# EAGLE board KW2CPU.PCB (EAGLE 6.5.0)
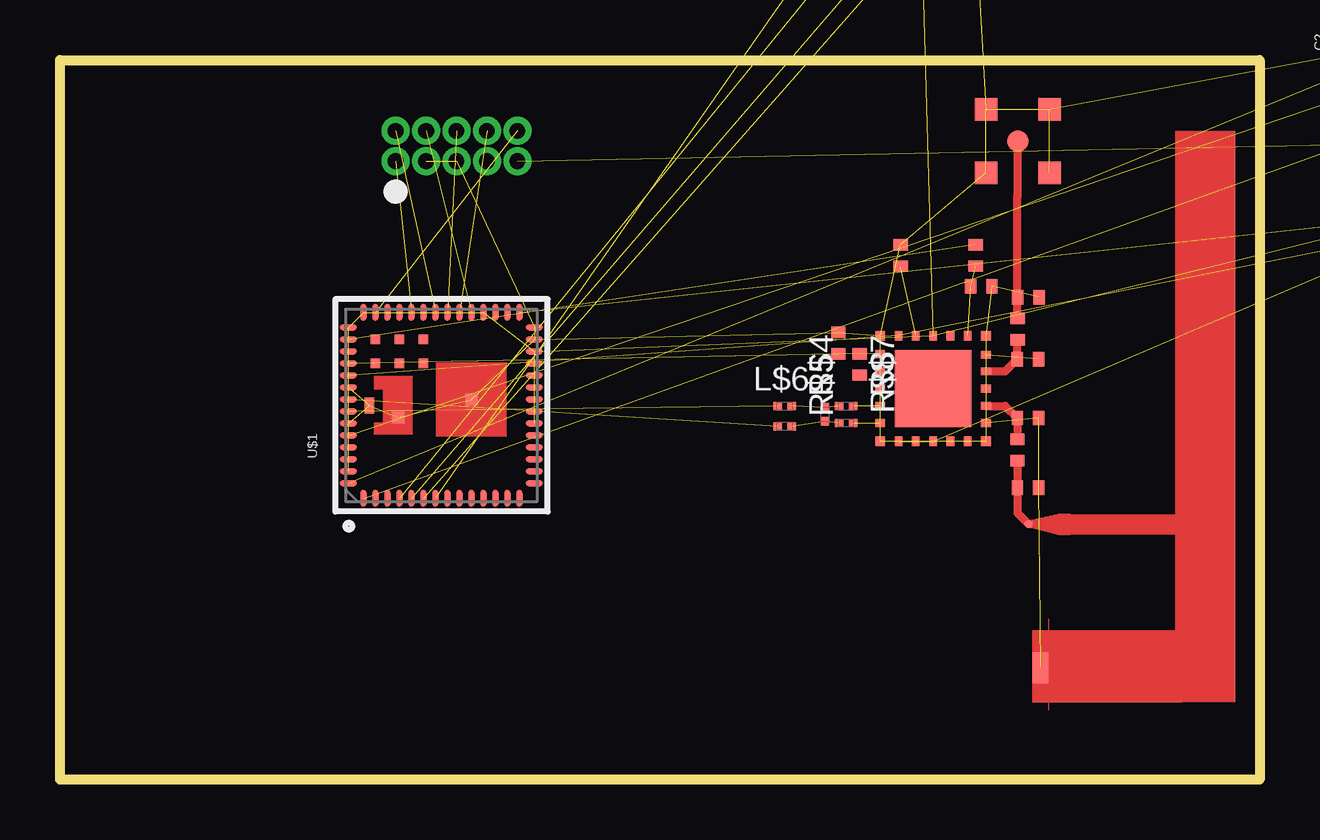
[diagram p0: board, top side]

Size 50 x 30 mm. Coordinates in mm from the lower left corner, seen from the top.
Outline: 0,30 50,30 50,0 0,0 0,30
Copper layers (1*2*3*16): Top 0.035559375mm / dielectric 10mil / Route2 0.035559375mm / dielectric 38mil / Route3 0.035559375mm / dielectric 10mil / Bottom 0.035559375mm
Design rules "SilverCircuits *": minimum track width 7mil, minimum drill 14mil, track to track 7mil, track to pad 7mil, pad to pad 7mil, via to via 7mil, smd to smd 0mil, copper to edge 20mil, drill to drill 8mil, minimum pad ring 10mil, minimum via ring 8mil, stop-mask expansion 4mil, vias tented up to drill 0mil, thermal gap 10mil

## Footprints (pad centres in the part's own frame; a part is rotated, then mirrored left to right if it is on the bottom)
C0402 = smd 0.5 x 0.6: 1 -0.5,0; 2 0.5,0
RF-L0201 = smd 0.33 x 0.356: P$1 0,-0.29; P$2 0,0.29
RFMD0402 = smd 0.475 x 0.6: P$1 -0.445,0; P$2 0.445,0
8S1 = smd 0.6 x 1.6: 1 -1.905,-2.654; 2 -0.645,-2.654; 3 0.625,-2.654; 4 1.895,-2.654; 5 1.905,2.654; 6 0.635,2.654; 7 -0.635,2.654; 8 -1.905,2.654
2X5HDR = drill 0.65: P$1 -2.54,-1.27; P$2 -2.54,0; P$3 -1.27,-1.27; P$4 -1.27,0; P$5 0,-1.27; P$6 0,0; P$7 1.27,-1.27; P$8 1.27,0; P$9 2.54,-1.27; P$10 2.54,0
RF-R0402 = smd 0.5 x 0.6: 1 -0.5,0; 2 0.5,0
LGA63 = smd 0.711 x 0.254: P$1 0.125,7.25; P$2 0.125,6.75; P$3 0.125,6.25; P$4 0.125,5.75; P$5 0.125,5.25; P$6 0.125,4.75; P$7 0.135,4.25; P$8 0.135,3.75; P$9 0.125,3.25; P$10 0.125,2.75; P$11 0.125,2.25; P$12 0.125,1.75; P$13 0.125,1.25; P$14 0.125,0.75; P$29 7.875,0.75; P$30 7.875,1.25; P$31 7.875,1.75; P$32 7.875,2.25; P$33 7.875,2.75; P$34 7.875,3.25; P$35 7.885,3.75; P$36 7.885,4.25; P$37 7.875,4.75; P$38 7.875,5.25; P$39 7.875,5.75; P$40 7.875,6.25; P$41 7.875,6.75; P$42 7.875,7.25 | smd 0.254 x 0.711: P$15 0.75,0.125; P$16 1.25,0.125; P$17 1.75,0.125; P$18 2.25,0.125; P$19 2.75,0.125; P$20 3.25,0.125; P$21 3.75,0.135; P$22 4.25,0.135; P$23 4.75,0.125; P$24 5.25,0.125; P$25 5.75,0.125; P$26 6.25,0.125; P$27 6.75,0.125; P$28 7.25,0.125; P$43 7.25,7.875; P$44 6.75,7.875; P$45 6.25,7.875; P$46 5.75,7.875; P$47 5.25,7.874; P$48 4.751,7.874; P$49 4.25,7.874; P$50 3.75,7.875; P$51 3.25,7.875; P$52 2.75,7.875; P$53 2.25,7.875; P$54 1.75,7.875; P$55 1.25,7.875; P$56 0.75,7.875 | smd 0.406 x 0.406: P$57 5.75,6.75; P$58 6.75,6.75; P$59 5.75,5.75; P$60 6.75,5.75; P$61 5.75,4.75; P$62 6.75,4.75 | smd 0.66 x 0.406: P$63 4,7 | smd 0.5 x 0.5: P$64 3.5,5.812; P$65 4.25,2.75
32MHZSMD = smd 1.4 x 1.2: P$1 -1.1,-0.8; P$2 1.1,-0.8; P$3 1.1,0.8; P$4 -1.1,0.8
RF6555 = smd 0.4 x 0.4: P$1 -2.2,2.2; P$7 -2.2,-2.2; P$13 2.2,-2.2; P$19 2.2,2.2 | smd 0.4 x 0.32: P$2 -2.2,1.44; P$3 -2.2,0.72; P$4 -2.2,0; P$5 -2.2,-0.72; P$6 -2.2,-1.44; P$14 2.2,-1.44; P$15 2.2,-0.72; P$16 2.2,0; P$17 2.2,0.72; P$18 2.2,1.4 | smd 0.32 x 0.4: P$8 -1.44,-2.2; P$9 -0.72,-2.2; P$10 0,-2.2; P$11 0.72,-2.2; P$12 1.44,-2.2; P$20 1.44,2.2; P$21 0.72,2.2; P$22 0,2.2; P$23 -0.72,2.2; P$24 -1.44,2.2 | smd 3.2 x 3.2: P$25 0,0
F_ANT_RFMD = smd 0.333 x 0.333: P$1 -3.912,2.68 | smd 0.635 x 1.27: P$2 -3.404,-3.302
MMCX_VERT = smd 0.89 x 0.89: P$1 0,0 | smd 0.94 x 0.94: P$2 -1.32,1.32; P$3 1.32,1.32; P$4 1.32,-1.32; P$5 -1.32,-1.32

## Placement (x,y rotation side)
C1  12pF  [C0402]  61.59,32.27 270 top  (outside the outline)
C2  12pF  [C0402]  76.46,37.03 90 top  (outside the outline)
C5  0.1uF  [C0402]  79.5,37.8 90 top  (outside the outline)
C6  1000pF  [C0402]  81.3,37.8 90 top  (outside the outline)
C7  5pF  [C0402]  80.4,37.8 90 top  (outside the outline)
C8  0.33uF  [C0402]  85.3,38 90 top  (outside the outline)
C9  33pF  [C0402]  84.4,38 90 top  (outside the outline)
C10  5pF  [C0402]  83.8,26.2 270 top  (outside the outline)
C11  1000pF  [C0402]  82.8,26.2 270 top  (outside the outline)
C12  0.33uF  [C0402]  81.8,26.2 270 top  (outside the outline)
C13  5pF  [C0402]  91,30.8 90 top  (outside the outline)
C14  1000pF  [C0402]  90,30.8 90 top  (outside the outline)
C15  0.1uF  [C0402]  89,30.8 90 top  (outside the outline)
C16  0.1uF  [C0402]  89.2,38.1 0 top  (outside the outline)
C17  1000pF  [C0402]  89.2,37.1 0 top  (outside the outline)
C18  5pF  [C0402]  89.2,36.1 0 top  (outside the outline)
C19  0.1uF  [C0402]  85.7,26.2 90 top  (outside the outline)
C$9  [RF-L0201]  60,40 0 top  (outside the outline)
C$10  [RF-L0201]  62,39 0 top  (outside the outline)
C$13  [RFMD0402]  40.35,15.07 0 top
C$15  [RFMD0402]  40.35,12.17 0 top
C$16  [RFMD0402]  40.37,20.11 0 top
C$18  [RFMD0402]  40.34,17.52 0 top
C$20  [RFMD0402]  38.4,20.57 180 top
C$21  [RFMD0402]  67,26 0 top  (outside the outline)
C$22  [RFMD0402]  67,25 0 top  (outside the outline)
C$24  [RFMD0402]  32.45,18.19 90 top
IC1  AT45DB161D8S1  [8S1]  40.3,45.2 90 top  (outside the outline)
JP1  [2X5HDR]  16.53,27.05 0 top
L$6  [RF-L0201]  31.88,15.22 0 top
L$11  [RFMD0402]  67,27 0 top  (outside the outline)
L$14  [RFMD0402]  39.91,13.74 270 top
L$17  [RFMD0402]  39.91,18.78 270 top
R1  1M  [RF-R0402]  86.7,26.2 90 top  (outside the outline)
R2  10k  [RF-R0402]  35.63,45.47 270 top  (outside the outline)
R3  10k  [RF-R0402]  40.52,48.76 180 top  (outside the outline)
R4  10k  [RF-R0402]  95,27.3 0 top  (outside the outline)
R$4  [RF-L0201]  30.22,15.56 270 top
R$5  [RF-L0201]  30.22,14.73 270 top
R$7  [RF-L0201]  32.77,15.56 270 top
R$8  [RF-L0201]  32.77,14.86 270 top
R$12  [RFMD0402]  35.04,21.85 90 top
R$19  [RFMD0402]  38.16,21.85 90 top
R$23  [RFMD0402]  33.33,17.31 270 top
U$1  MKW21D  [LGA63]  19.9,11.6 90 top
U$2  32MHZ  [32MHZSMD]  65.1,32 90 top  (outside the outline)
U$3  RF6555  [RF6555]  36.39,16.3 0 top
U$4  F-ANTENNA  [F_ANT_RFMD]  44.28,7.97 0 top
U$5  MMCX_VERT  [MMCX_VERT]  39.92,26.62 0 top

## Library data of the parts
C1 C2 C5-C19 C$9 C$10 C$13 C$15 C$16 C$18 C$20-C$22 C$24 L$6 L$11 L$14 L$17 R1-R4 R$4 R$5 R$7 R$8 R$12 R$19 R$23 = GW-devices
IC1 JP1 U$2-U$5 = KW2
U$1 = ZIGBEE

## Nets
+3V3: C8.1 C9.1 C10.1 C11.1 C12.1 C13.1 C14.1 C15.1 C16.1 C17.1 C18.1 C19.1 C$21.P$1 IC1.6 JP1.P$1 L$11.P$2 R1.1 R2.2 R3.2 R4.2 U$1.P$20 U$1.P$25 U$1.P$26 U$1.P$32 U$1.P$38 U$1.P$42 U$1.P$43 U$1.P$55 U$3.P$22
CLKM1: C1.1 U$1.P$56 U$2.P$3
CLKM2: C2.1 U$1.P$1 U$2.P$1
GND: C1.2 C2.2 C5.2 C6.2 C7.2 C8.2 C9.2 C10.2 C11.2 C12.2 C13.2 C14.2 C15.2 C16.2 C17.2 C18.2 C19.2 C$9.P$1 C$10.P$2 C$13.P$2 C$15.P$2 C$16.P$2 C$18.P$2 C$20.P$1 C$21.P$2 C$22.P$1 C$24.P$2 IC1.7 JP1.P$3 JP1.P$5 R$12.P$2 U$1.P$27 U$1.P$28 U$1.P$48 U$1.P$51 U$1.P$63 U$1.P$64 U$1.P$65 U$2.P$2 U$2.P$4 U$3.P$1 U$3.P$3 U$3.P$7 U$3.P$9 U$3.P$12 U$3.P$13 U$3.P$14 U$3.P$16 U$3.P$18 U$3.P$19 U$4.P$2 U$5.P$2 U$5.P$3 U$5.P$4 U$5.P$5
N$1: R1.2 U$1.P$29
N$2: R$5.P$1 U$1.P$49
N$3: R$4.P$1 U$1.P$50
N$4: L$6.P$2 R$4.P$2 R$7.P$1
N$5: L$6.P$1 R$5.P$2 R$8.P$1
N$6: C5.1 C6.1 C7.1 U$1.P$52 U$1.P$53 U$1.P$54
N$7: IC1.4 U$1.P$4
N$8: IC1.3 R3.1
N$9: IC1.5 R2.1
N$10: JP1.P$2 U$1.P$36
N$11: JP1.P$4 U$1.P$33
N$12: JP1.P$6 U$1.P$35
N$13: JP1.P$8 U$1.P$34
N$14: JP1.P$10 U$1.P$41
N$15: JP1.P$9 R4.1
N$16: IC1.2 U$1.P$5
N$17: IC1.1 U$1.P$6
N$18: IC1.8 U$1.P$7
N$19: R$7.P$2 U$3.P$5
N$20: R$8.P$2 U$3.P$6
N$21: C$13.P$1 L$14.P$1 U$3.P$15
N$22: C$9.P$2 C$10.P$1 L$11.P$1 U$3.P$8 U$3.P$10
N$23: C$15.P$1 L$14.P$2 U$4.P$1
N$24: C$18.P$1 L$17.P$2 U$3.P$17
N$25: C$16.P$1 L$17.P$1 U$5.P$1
N$26: R$19.P$2 U$1.P$44
N$27: C$20.P$2 R$19.P$1 U$3.P$20
N$29: R$12.P$1 U$3.P$23
N$30: C$24.P$1 R$23.P$1 U$1.P$46 U$3.P$2
N$31: C$22.P$2 U$1.P$47 U$3.P$24

## Tracks (layer width: path | path; a pad name or v marks a point on that pad's centre or on a via)
+3V3  (28 unrouted)
CLKM1  (2 unrouted)
CLKM2  (2 unrouted)
GND  (54 unrouted)
N$1  (1 unrouted)
N$2  (1 unrouted)
N$3  (1 unrouted)
N$4  (2 unrouted)
N$5  (2 unrouted)
N$6  (5 unrouted)
N$7  (1 unrouted)
N$8  (1 unrouted)
N$9  (1 unrouted)
N$10  (1 unrouted)
N$11  (1 unrouted)
N$12  (1 unrouted)
N$13  (1 unrouted)
N$14  (1 unrouted)
N$15  (1 unrouted)
N$16  (1 unrouted)
N$17  (1 unrouted)
N$18  (1 unrouted)
N$19  (1 unrouted)
N$20  (1 unrouted)
N$21
  Top 0.333: U$3.P$15 39.39,15.58 C$13.P$1 L$14.P$1 39.91,14.11
N$22  (4 unrouted)
N$23
  Top 0.333: C$15.P$1 | C$15.P$1 39.91,11.11 U$4.P$1 | L$14.P$2 39.91,13.23 39.91,12.47 C$15.P$1
N$24
  Top 0.333: U$3.P$17 39.4,17.02 39.51,17.13 39.54,17.16 C$18.P$1 39.9,18.14 39.91,18.14 L$17.P$2
N$25
  Top 0.333: L$17.P$1 39.91,19.84 39.9,19.84 39.9,19.98 39.92,20 C$16.P$1 39.91,20.13 39.91,24.31 39.92,24.33 U$5.P$1
N$26  (1 unrouted)
N$27  (2 unrouted)
N$29  (1 unrouted)
N$30  (3 unrouted)
N$31  (2 unrouted)